# Altium PCB STM32F103C8T6_custom-board.PcbDoc
Units mil, origin at the board's own origin, x right, y up, seen from the top; angles counter-clockwise.
Board outline 900 x 2100 mil, 2 copper layers (Top Layer, Bottom Layer); 45 components, 56 nets, 197 pads, 0 vias.
Unrouted connection lines stored in the file: 136.
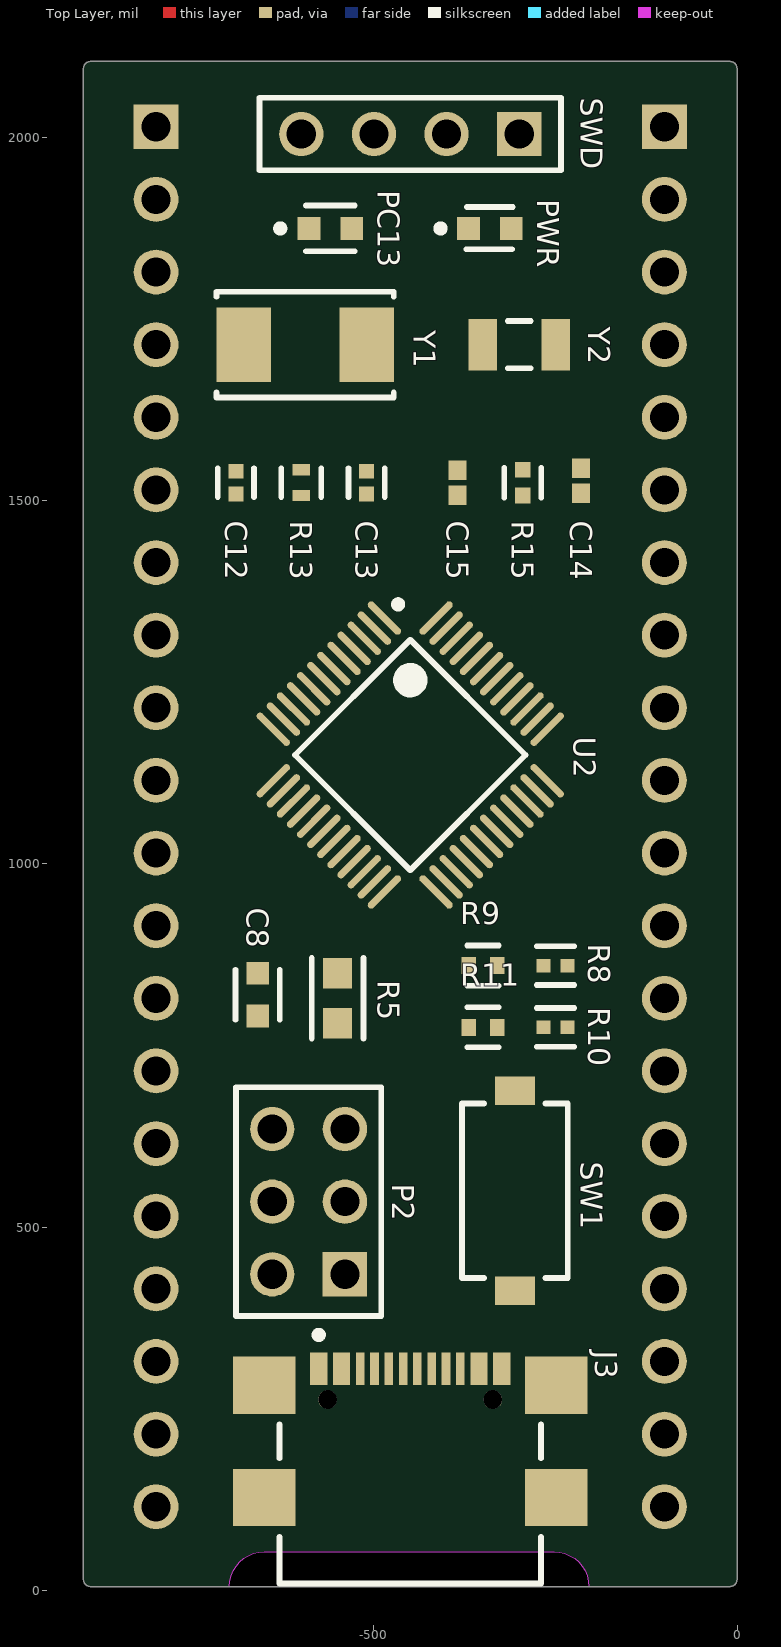
[diagram p0: Top Layer view]
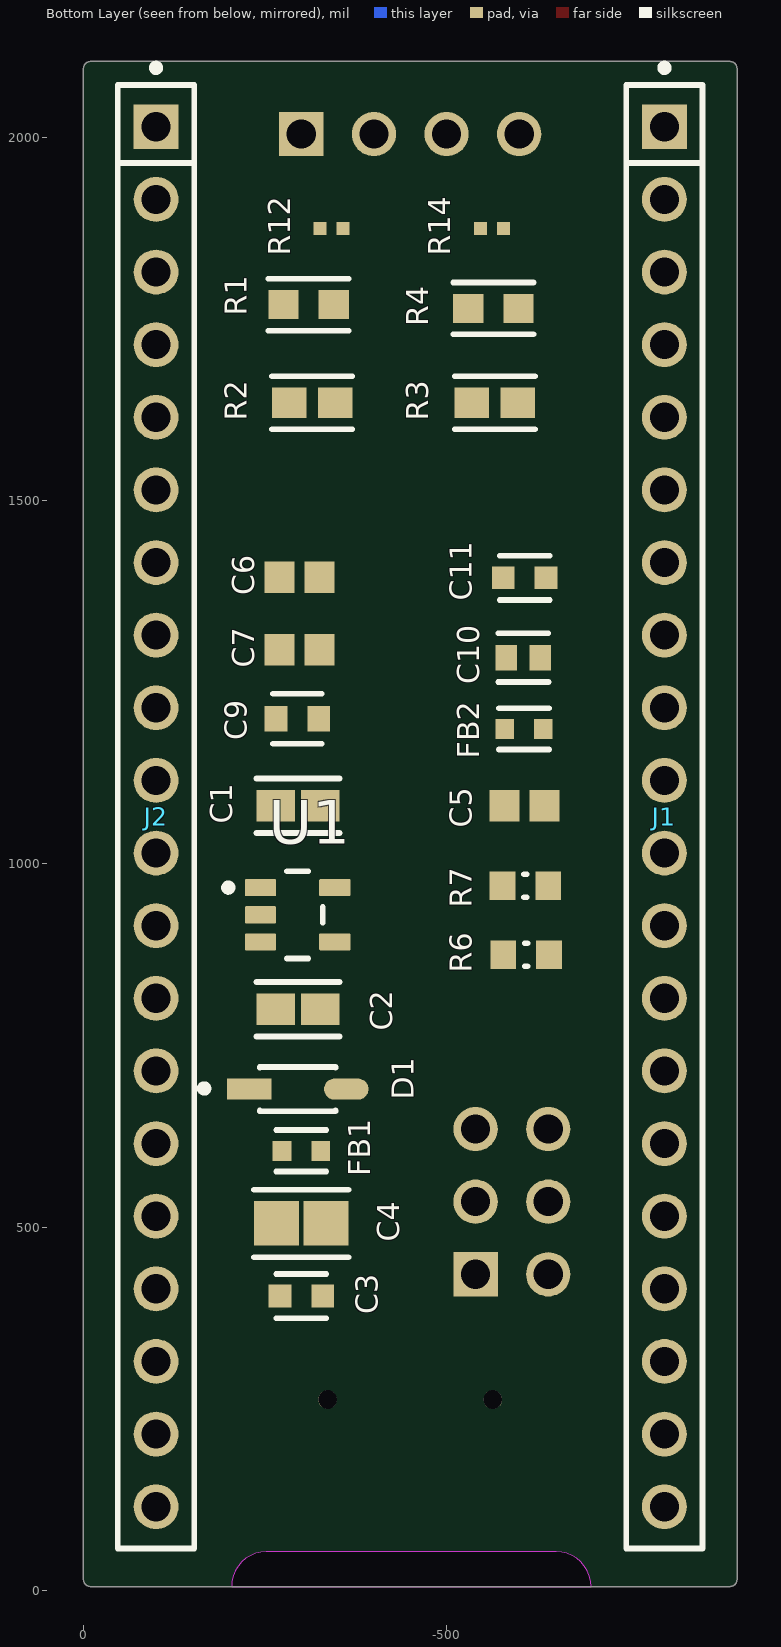
[diagram p1: Bottom Layer view, seen from below]

## Layer stack, top to bottom
Top Solder: solder mask 0.4, Solder Resist, Dk 3.5
Top Layer: signal copper 1.4
Dielectric 1: dielectric 12.6, FR-4, Dk 4.8
Bottom Layer: signal copper 1.4
Bottom Solder: solder mask 0.4, Solder Resist, Dk 3.5

## Board outline
-900,15 ccw(c-890,15) -890,5 -10,5 ccw(c-10,15) 0,15 0,2095 ccw(c-10,2095) -10,2105 -890,2105 ccw(c-890,2095) -900,2095
cut-out: -698.99,5 cw(c-650.99,5) -650.99,53 -252,53 cw(c-252,5) -204,5

## Design rules (kind name [scope] priority, off if disabled: settings)
Clearance [All] p1: gap=10 ignorepadtopadclearanceinfootprint=FALSE
PolygonConnect [All] p1: connectstyle=Relief reliefconductorwidth=10 reliefentries=4 polygonreliefangle="90 Angle" airgapwidth=10
RoutingVias [All] p1: holewidth=28 width=50 viastyle="Through Hole" minholewidth=28 minwidth=50 maxholewidth=28 maxwidth=50
SolderMaskExpansion [All] p1: expansion=4 istentingtop=FALSE
SupplyNets "Schematic Supply Nets_3" [InNet('VBUS')] p1: voltage=0.000
SupplyNets "Schematic Supply Nets_2" [InNet('+3.3V')] p2: voltage=0.000
SupplyNets "Schematic Supply Nets_1" [InNet('GND')] p3: voltage=0.000
SupplyNets "Schematic Supply Nets" [InNet('+5V')] p4: voltage=0.000
Width [All] p1: maxlimit=10 minlimit=10 preferedwidth=10
30 further rules are at their usual default settings.

## Components (designator, comment, footprint, x,y, rotation, side; value= is the part's Value field where it differs from the comment)
C1 "10uF 0603" FP-CC0603-DC-IPC_A -295.54,1080 r0 bottom
C2 "10uF 0603" FP-CC0603-DC-IPC_A -295.54,800 r180 bottom
C3 "1uF 0603" FP-VJ0603Y105KXJCW1BC-MFG -300,405 r0 bottom
C4 "47uF 0805" FP-C2012-125-0_2-IPC_A -300,505 r0 bottom
C5 "0.1uF 0603" CAPC1608X95X40ML15T15 -607.56,1080 r180 bottom
C6 "0.1uF 0603" CAPC1608X95X40ML15T15 -297.56,1395 r0 bottom
C7 "0.1uF 0603" CAPC1608X95X40ML15T15 -297.56,1295 r180 bottom
C8 "1uF 0603" FP-VJ0603Y105KXJCW1BC-MFG -660,820 r270 top
C9 "4.7uF 0603" FP-CC0603-DC-MFG -294.53,1200 r180 bottom
C10 "10nF 0603" FP-C0603C-CF-MFG -605.62,1284 r180 bottom value="10,000 pF"
C11 "1uF 0603" FP-VJ0603Y105KXJCW1BC-MFG -607.53,1394 r180 bottom
C12 "8pF 0402" FP-C0402-BB-MFG -690,1525 r270 top value="8.2 pF"
C13 "8pF 0402" FP-C0402-BB-MFG -510,1525 r90 top value="8.2 pF"
C14 "9pF 0402" CAPC1005X56X25NL10T15 -215,1527.68 r90 top
C15 "9pF 0402" CAPC1005X56X25NL10T15 -385,1525 r90 top
D1 "40V 1A" FP-SOD123-IPC_A -295,690 r180 bottom
FB1 "120Ω 0603" FP-BLM18-0_15-t0_8-MFG -300,605 r180 bottom
FB2 "120Ω 0603" FP-BLM18-0_15-t0_8-MFG -606.57,1186 r0 bottom
J1 "Header 20 pin" FP-TSW-120-05-G-S-MFG -800,1065 r270 bottom
J2 "Header 20 pin" FP-TSW-120-05-G-S-MFG -100,1065 r270 bottom
J3 "USB4110-GF-A" FP-USB4110-GF-A-MFG -450,160 r0 top
P2 "Jumper 3x2" SMTC-TSW-103-08-X-D -540,435 r90 top
PC13 "BLUE LED" FP-LTST-C191TBKT-MFG -560,1875 r0 top (schematic designator D3)
PWR "RED LED" FP-SML-LX0603IW-TR-MFG -340.47,1875 r0 top (schematic designator D2)
R1 "10kΩ 0603" FP-AC0603-IPC_A -310,1770 r180 bottom
R2 "22Ω 0603" FP-RMCF0603-IPC_A -315,1635 r0 bottom
R3 "22Ω 0603" FP-RMCF0603-IPC_A -566.54,1635 r180 bottom
R4 "10kΩ 0603" FP-AC0603-IPC_A -564.52,1765 r0 bottom
R5 "10kΩ 0603" FP-AC0603-IPC_A -550,815 r270 top
R6 "100kΩ 0603" RESC0603(1608)_N -609.5,875 r180 bottom value="100000.00 Ohm"
R7 "100kΩ 0603" RESC0603(1608)_N -608.5,970 r0 bottom value="100000.00 Ohm"
R8 "5.1kΩ 0402" FP-RN73R1E-IPC_C -250,860 r0 top
R9 "22Ω 0402" FP-RMCF0402-MFG -349.68,860 r0 top
R10 "5.1kΩ 0402" FP-RN73R1E-IPC_C -250,775 r0 top
R11 "22Ω 0402" FP-RMCF0402-MFG -349.68,775 r0 top
R12 "510Ω 0402" RESC1005X40X25LL05T05 -341.75,1875 r0 bottom
R13 "200kΩ 0402" FP-CRCW0402-Pe3-MFG -600,1525 r90 top
R14 "510Ω 0402" RESC1005X40X25LL05T05 -562.75,1875 r180 bottom
R15 "1MΩ 0402" FP-MCS0402-MFG -295,1525 r90 top
SW1 "" FP-PTS635SK25SM-MFG -306,550 r90 top
SWD "Header 4 pin" SMTC-TSW-104-08-X-S -300,2005 r180 top (schematic designator P1)
U1 "TLV75733PDBVR" FP-DBV0005A-MFG -295,930 r180 bottom
U2 "STM32F103C8T6" STM-LQFP48_L -450,1150 r315 top
Y1 "8MHz" FP-ABM7-MFG -594.65,1715 r180 top
Y2 "32.768KHz" FP-ABS07AIG-MFG -300,1715 r180 top

## Footprints (in the part's own frame and the unit in brackets; to place one, negate y for a bottom-side part, rotate by r counter-clockwise, add the part's x,y. Pads: shape width x height; smd on the part's side, far side on the other; paste and mask are expansions set on the pad)
CAPC1005X56X25NL10T15 [mm] "Chip Capacitor, 2-Leads, Body 1.00x0.50mm, IPC Medium Density"
  rect 0.68x0.64 smd: 1(-0.44,0) 2(0.44,0)
  body extent -0.55,-0.3 0.55,0.3, height 0.56
CAPC1608X95X40ML15T15 [mm] "Chip Capacitor, 2-Leads, Body 1.60x0.80mm, IPC Low Density"
  rect 1.05x1.1 smd: 1(-0.7,0) 2(0.7,0)
  body extent -0.88,-0.48 0.87,0.47, height 0.95
FP-ABM7-MFG [mm]
  rect 1.9x2.6 smd paste+0 mask+0: 1(-2.15,0) 2(2.15,0)
  silkscreen extent -3.1,-1.85 3.1,1.85, body extent -3.2,-1.95 3.2,1.95, height 0.25
FP-ABS07AIG-MFG [mm]
  rect 1x1.8 smd paste+0 mask+0: 1(-1.275,0) 2(1.275,0)
  silkscreen extent -0.4,-0.82 0.4,0.82, body extent -1.88,-1 1.87,1, height 0.25
FP-AC0603-IPC_A [mil]
  rect 41.68x39.85 smd paste+0 mask+0: 1(-34.52,0) 2(34.52,0)
  silkscreen extent -55,-36 55,36, body extent -31,-16 31,16, height 22
FP-BLM18-0_15-t0_8-MFG [mm]
  rect 0.65x0.7 smd paste+0 mask+0: 1(-0.675,0) 2(0.675,0)
  silkscreen extent -0.87,-0.73 0.87,0.73, body extent -0.8,-0.4 0.8,0.4, height 0.95
FP-C0402-BB-MFG [mm]
  rect 0.52x0.52 smd paste+0 mask+0: 1(-0.4,0) 2(0.4,0)
  silkscreen extent -0.5,-0.64 0.5,0.64, body extent -0.8,-0.4 0.8,0.4, height 0.25
FP-C0603C-CF-MFG [mm]
  rect 0.75x0.9 smd paste+0 mask+0: 1(-0.6,0) 2(0.6,0)
  silkscreen extent -0.87,-0.85 0.88,0.85, body extent -0.8,-0.4 0.8,0.4, height 0.87
FP-C2012-125-0_2-IPC_A [mil]
  rect 62.13x61.27 smd paste+0 mask+0: 1(-34.02,0) 2(34.02,0)
  silkscreen extent -65,-46 65,46, body extent -39,-25 39,25, height 57
FP-CC0603-DC-IPC_A [mil]
  rect 53.34x43.55 smd paste+0 mask+0: 1(-30.54,0) 2(30.54,0)
  silkscreen extent -57,-38 57,38, body extent -31,-16 31,16, height 39
FP-CC0603-DC-MFG [mm]
  rect 0.8x0.9 smd paste+0 mask+0: 1(-0.75,0) 2(0.75,0)
  silkscreen extent -0.85,-0.87 0.85,0.87, body extent -0.8,-0.4 0.8,0.4, height 1
FP-CRCW0402-Pe3-MFG [mm]
  rect 0.4x0.6 smd paste+0 mask+0: 1(-0.45,0) 2(0.45,0)
  silkscreen extent -0.5,-0.7 0.5,0.7, body extent -0.75,-0.4 0.75,0.4, height 0.25
FP-DBV0005A-MFG [mm]
  rrect17% 1.1x0.6 smd paste+0 mask+0: 1(-1.3,0.95) 2(-1.3,0) 3(-1.3,-0.95) 4(1.3,-0.95) 5(1.3,0.95)
  silkscreen extent -2.55,-1.53 0.87,1.52, body extent -1.4,-1.45 1.4,1.45, height 1.45
FP-LTST-C191TBKT-MFG [mm]
  rect 0.8x0.8 smd paste+0 mask+0: 1(-0.75,0) 2(0.75,0)
  silkscreen extent -1.87,-0.8 0.85,0.8, body extent -1.25,-0.55 1.25,0.55, height 0.25
FP-MCS0402-MFG [mm]
  rect 0.55x0.55 smd paste+0 mask+0: 1(-0.45,0) 2(0.45,0)
  silkscreen extent -0.53,-0.65 0.53,0.65, body extent -0.82,-0.38 0.82,0.38, height 0.25
FP-PTS635SK25SM-MFG [mm]
  rect 1x1.4 smd paste+0 mask+0: 1(-3.5,0) 2(3.5,0)
  silkscreen extent -3.05,-1.85 3.05,1.85, body extent -4.1,-1.95 4.1,1.95, height 0.25
FP-RMCF0402-MFG [mm]
  rect 0.5x0.6 smd paste+0 mask+0: 1(-0.5,0) 2(0.5,0)
  silkscreen extent -0.55,-0.7 0.55,0.7, body extent -0.85,-0.4 0.85,0.4, height 0.25
FP-RMCF0603-IPC_A [mil]
  rect 47.48x41.66 smd paste+0 mask+0: 1(-31.54,0) 2(31.54,0)
  silkscreen extent -55,-37 55,37, body extent -31,-16 31,16, height 22
FP-RN73R1E-IPC_C [mil]
  rect 19.2x18.6 smd paste+0 mask+0: 1(-16.3,0) 2(16.3,0)
  silkscreen extent -26,-27 26,27, body extent -30,-15 30,15, height 10
FP-SML-LX0603IW-TR-MFG [mm]
  rect 0.8x0.8 smd paste+0 mask+0: 1(-0.75,0) 2(0.75,0)
  silkscreen extent -1.85,-0.73 0.8,0.75, body extent -1.25,-0.63 1.25,0.63, height 0.25
FP-SOD123-IPC_A [mil]
  rect 61.32x29.23 smd paste+0 mask+0: 1(-66.94,0)
  rrect100% 61.32x29.23 smd paste+0 mask+0: 2(66.94,0)
  silkscreen extent -134,-31 52,31, body extent -72,-31 72,31, height 57
FP-TSW-120-05-G-S-MFG [mm]
  rect 1.57x1.57 hole 1.02 paste-2539.97 mask+0: 1(-24.13,0)
  round 1.57 hole 1.02 paste-2539.97 mask+0: 2(-21.59,0) 3(-19.05,0) 4(-16.51,0) 5(-13.97,0) 6(-11.43,0) 7(-8.89,0) 8(-6.35,0) 9(-3.81,0) 10(-1.27,0) 11(1.27,0) 12(3.81,0) 13(6.35,0) 14(8.89,0) 15(11.43,0) 16(13.97,0) 17(16.51,0) 18(19.05,0) 19(21.59,0) 20(24.13,0)
  silkscreen extent -26.31,-1.34 25.59,1.34, body extent -25.53,-1.27 25.4,1.27, height 5.54
FP-USB4110-GF-A-MFG [mm]
  rect 2.18x2 smd paste+0 mask+0: 1(-5.11,3.105) 2(5.11,3.105) 3(-5.11,-0.825) 4(5.11,-0.825)
  rect 0.6x1.15 smd paste+0 mask+0: A1-B12(-3.2,3.68) A4-B9(-2.4,3.68) B1-A12(3.2,3.68) B4-A9(2.4,3.68)
  rect 0.3x1.15 smd paste+0 mask+0: A5(-1.25,3.68) A6(-0.25,3.68) A7(0.25,3.68) A8(1.25,3.68) B5(1.75,3.68) B6(0.75,3.68) B7(-0.75,3.68) B8(-1.75,3.68)
  round 0.65 hole 0.65 unplated paste-2539.97 mask+0: ""(-2.89,2.605) ""(2.89,2.605)
  silkscreen extent -4.57,-3.83 4.57,4.99, body extent -6.3,-3.92 6.3,4.36, height 0.25
FP-VJ0603Y105KXJCW1BC-MFG [mm]
  rect 0.8x0.8 smd paste+0 mask+0: 1(-0.75,0) 2(0.75,0)
  silkscreen extent -0.87,-0.77 0.87,0.77, body extent -0.8,-0.4 0.8,0.4, height 0.95
RESC0603(1608)_N [mm] "Chip Resistor, Body 1.6x0.8mm, IPC Medium Density"
  rect 0.9x1 smd: 1(-0.8,0) 2(0.8,0)
  silkscreen extent -0.05,-0.4 0.05,0.4, body extent -0.85,-0.47 0.85,0.47, height 0.6
RESC1005X40X25LL05T05 [mm] "Chip Resistor, 2-Leads, Body 1.00x0.50mm, IPC High Density"
  rect 0.45x0.45 smd: 1(-0.4,0) 2(0.4,0)
  body extent -0.53,-0.27 0.53,0.28, height 0.4
SMTC-TSW-103-08-X-D [mm] ".025 SQ Post Terminal Strip Assembly, 2x3 Pins, Vertical, 2.54mm Pitch, Male"
  rect 1.55x1.55 hole 1.02: 1(0,0)
  round 1.55 hole 1.02: 2(0,2.54) 3(2.54,0) 4(2.54,2.54) 5(5.08,0) 6(5.08,2.54)
  silkscreen extent -1.46,-1.27 6.54,3.81, body extent -1.27,-1.27 6.35,3.81, height 8.38
SMTC-TSW-104-08-X-S [mm] ".025 SQ Post Terminal Strip Assembly, 1x4 Pins, Vertical, 2.54mm Pitch, Male"
  rect 1.55x1.55 hole 1.02: 1(0,0)
  round 1.55 hole 1.02: 2(2.54,0) 3(5.08,0) 4(7.62,0)
  silkscreen extent -1.46,-1.27 9.08,1.27, body extent -1.27,-1.27 8.89,1.27, height 8.38
STM-LQFP48_L [mm] "QFP, 48-Leads, Body 7x7mm, Pitch 0.5mm, IPC High Density"
  oval 1.55x0.25 smd: 1(-4.025,2.75) 2(-4.025,2.25) 3(-4.025,1.75) 4(-4.025,1.25) 5(-4.025,0.75) 6(-4.025,0.25) 7(-4.025,-0.25) 8(-4.025,-0.75) 9(-4.025,-1.25) 10(-4.025,-1.75) 11(-4.025,-2.25) 12(-4.025,-2.75) 25(4.025,-2.75) 26(4.025,-2.25) 27(4.025,-1.75) 28(4.025,-1.25) 29(4.025,-0.75) 30(4.025,-0.25) 31(4.025,0.25) 32(4.025,0.75) 33(4.025,1.25) 34(4.025,1.75) 35(4.025,2.25) 36(4.025,2.75)
  oval 0.25x1.55 smd: 13(-2.75,-4.025) 14(-2.25,-4.025) 15(-1.75,-4.025) 16(-1.25,-4.025) 17(-0.75,-4.025) 18(-0.25,-4.025) 19(0.25,-4.025) 20(0.75,-4.025) 21(1.25,-4.025) 22(1.75,-4.025) 23(2.25,-4.025) 24(2.75,-4.025) 37(2.75,4.025) 38(2.25,4.025) 39(1.75,4.025) 40(1.25,4.025) 41(0.75,4.025) 42(0.25,4.025) 43(-0.25,4.025) 44(-0.75,4.025) 45(-1.25,4.025) 46(-1.75,4.025) 47(-2.25,4.025) 48(-2.75,4.025)
  silkscreen extent -4.15,-2.85 2.85,3.55, body extent -3.5,-3.5 3.5,3.5, height 1.6

## Part data
C1 C2: library part CMP-03422-001507-1, "CAP CER 10UF 10V X5R 0603", Capacitance=10uF, Case Code (Imperial)=0603, Case Code (Metric)=1608, Dielectric=X5R, Max Operating Temperature=85°C, Min Operating Temperature=-55°C, Package Quantity=4000, Resistor Type=Ceramic, Tolerance=10%, Voltage Rating=10V, Case/Package=0603, Depth=0.8mm, Halogen Free="Halogen Free", Lead Free="Lead Free", Length=0.063inch, Mount="Surface Mount", Packaging="Tape and Reel", RoHS Compliant=Yes, Termination=SMD/SMT, Thickness=0.035inch, Voltage Rating (DC)=10V, Weight=7.1E-05oz, Width=0.031inch
C3 C8 C11: library part CMP-00030-45106517-1, "VJ0603Y105KXJCW1BC Multilayer Ceramic Capacitor, 1 uF, 16 V, ± 10%, X7R, 0603 [1608 Metric]", Capacitance=1µF, Case/Package=0603, Dielectric=X7R, Dielectric Material=Tantalum, Max Operating Temperature=125°C, Min Operating Temperature=-55°C, Tolerance=10%, Voltage Rating=16V, Depth=800µm, Height=950µm, Lead Free="Lead Free", Length=1.6mm, Material=Ceramic, Mount="Surface Mount", NexarPartId=45106517, Packaging="Tape and Reel", Radiation Hardening=No, RoHS=Compliant, Voltage Rating (DC)=16V
C4: library part CMP-08246-006522-1, "Multilayer Ceramic Capacitors 47μF ±20% 10V JB SMD 0805", Capacitance=47uF, Case Code (Imperial)=0805, Case Code (Metric)=2012, Dielectric Material=Ceramic, Max Operating Temperature=85°C, Min Operating Temperature=-25°C, Package Quantity=2000, Tolerance=20%, Voltage Rating=10V, Case/Package=0805, Height=1.25mm, Lead Free="Lead Free", Length=0.079inch, Mount="Surface Mount", Packaging="Tape and Reel", Resistor Type=Ceramic, RoHS Compliant=Yes, Series=C, Termination=SMD/SMT, Thickness=0.057inch, Voltage Rating (DC)=10V, Width=0.049inch
C5 C6 C7: library part CMP-2006-01550-1, Manufacturer=Vitramon, Part Number=VJ0603Y104KXQCW1BC
C9: library part CMP-03422-001038-2, "CAP CER 4.7UF 6.3V X7R 0603", Capacitance=4.7uF, Case Code (Imperial)=0603, Case Code (Metric)=1608, Max Operating Temperature=125°C, Min Operating Temperature=-55°C, Tolerance=20%, Voltage Rating=6.3V, Case/Package=0603, Mount="Surface Mount", Packaging="Cut Tape", RoHS Compliant=Yes
C10: library part CMP-03020-022676-1, "C0603 10,000 pF X7R 30ppm/°C 5.00% 16 V", Capacitance="10,000 pF", Manufacturer=KEMET, Manufacturer Part Number=C0603C103J4RACAUTO, Package=C0603C-CF, Temperature="-55°C to +125°C", Temperature Characteristic=X7R, Temperature Coefficient=30ppm/°C, Temperature Range High=+125°C, Temperature Range Low=-55°C, Tolerance=0.05, Voltage Rating="16 V", Automotive=Yes, Automotive Grade="Grade 1", Category=Cap, ComponentLink2Description=Datasheet, ComponentLink2URL=https://api.kemet.com/component-edge/download/datasheet/C0603C100J5GACAUTO.pdf, Device Class L1="Passive Components", Device Class L2=Capacitors, Device Class L3="Ceramic Capacitors", Height=0.87mm, Lead Free=Yes, Material=Ceramic, Octopart=https://octopart.com/c0603c103j4racauto-kemet-91893811, RoHS=TRUE
C12 C13: library part CMP-03020-024178-1, "C0402 8.2 pF C0G 0.5 pF 50 V", Capacitance="8.2 pF", Manufacturer=Kemet, Manufacturer Part Number=C0402C829D5GACAUTO, Package=C0402-BB, Temperature="-55°C to +125°C", Temperature Characteristic=C0G, Temperature Coefficient=15%, Temperature Range High=+125°C, Temperature Range Low=-55°C, Tolerance="0.5 pF", Voltage Rating="50 V", Automotive=No, Category=Cap, ComponentLink2Description=Datasheet, ComponentLink2URL=https://content.kemet.com/datasheets/KEM_C1002_X7R_SMD.pdf, Device Class L1="Passive Components", Device Class L2=Capacitors, Device Class L3="Ceramic Capacitors", Height=0.55mm, Ipc Land Pattern Name=CAPC10050X50, Lead Free=Yes, Material=Ceramic, Octopart=https://octopart.com/c0402c829d5gacauto-kemet-89441553, RoHS=TRUE
C14 C15: library part CMP-2008-02458-1, Manufacturer="AVX Interconnect / Elco", Part Number=04023A100DAT2A
D1: library part CMP-0303-00003-3, "DIODE SCHOTTKY 40V 1A SOD123", Average Rectified Current=1A, Capacitance=110pF, Case/Package=SOD-123-2, Forward Voltage=450mV, Max Forward Surge Current (Ifsm)=25A, Max Operating Temperature=125°C, Max Power Dissipation=450mW, Max Repetitive Reverse Voltage (Vrrm)=40V, Min Operating Temperature=-65°C, Package Quantity=3000, Peak Reverse Current=50uA, Contact Plating=Tin, Current Rating=1A, Element Configuration=Single, Forward Current=1A, Height=1.25mm, Lead Free="Lead Free", Length=2.85mm, Max Reverse Voltage (DC)=40V, Number of Pins=2, Output Current=1A, Packaging="Tape and Reel", Peak Non-Repetitive Surge Current=25A, Polarity=Standard, Radiation Hardening=No, REACH SVHC="No SVHC", Termination=SMD/SMT, Voltage Rating (DC)=40V, Weight=0.000353oz, Width=1.7mm
FB1 FB2: library part CMP-06046-002776-1, "Chip Ferrite Bead, 0603, 120Ω @ 100MHz, 0.05Ω, 25%, 2A", RoHS Compliant=Yes
J1 J2: library part CMP-00575-00271415-1, "TSW-120-05-G-S Headers & Wire Housings Classic PCB Header Strips, 0.100 pitch", Color=Black, Manufacturer Lifecycle Status=PRODUCTION, Connector Type="Male Pin", Contact Material=Bronze, Contact Mating Length=2.667mm, Contact Plating=Gold, Gender=Male, Height=2.54mm, Housing Color=Black, Housing Material=Plastic, Lead Free="Lead Free", Lead Pitch=2.54mm, Length=50.8mm, Lifecycle Status=Production, Mount="Through Hole", NexarPartId=271415, Number of Contacts=20, Number of Positions=20, Number of Rows=1, Pitch=2.54mm, REACH SVHC="No SVHC", RoHS=Compliant, Termination=Solder, Width=2.54mm
J3: library part CMP-245163-000002-1, "CONN USB 2.0 TYPE-C R/A SMT", Current Rating=3/4.25/1.25/0.25A, Manufacturer=GCT, Package=0, Temperature="-40°C to +85°C", Temperature Range High=+85°C, Temperature Range Low=-40°C, Voltage Rating=20V, Automotive=No, Category=Conn, ComponentLink2Description=Datasheet, ComponentLink2URL=https://gct.co/files/drawings/usb4110.pdf, Conn Orientation="Right Angle", Contact Material=Gold,Nickel, Device Class L1=Connectors, Device Class L2="USB Connectors", Device Class L3=unset, Digikey Description="CONN USB 2.0 TYPE-C R/A SMT", Height=3.46mm, Is Female=yes, Lead Free=Yes, Manufacturer Part Number=USB4110-GF-A, Number of Contacts=16, Octopart=https://octopart.com/usb4110-gf-a-gct-103941985, RoHS=TRUE, Shielding=true, Standoff Height=0.1mm, Usb Standard="USB 2.0"
P2: library part CMP-1024-00337-1, "0.025\" SQ Post Header, Through-hole, Vertical, -55 to 125 degC, 2.54 mm Pitch, 6-Pin, Male, RoHS", Manufacturer=Samtec, PartNumber=TSW-103-08-F-D, Temperature Range="-55 to 125 degC", ComponentLink1Description="Manufacturer URL", ComponentLink1URL=http://www.samtec.com, ComponentLink2Description=Datasheet, ComponentLink2URL=http://www.samtec.com/documents/webfiles/pdf/TSW_TH.PDF, ComponentLink3Description="Package Specification", ComponentLink3URL=http://www.samtec.com/documents/webfiles/cpdf/TSW-XXX-XX-XXX-X-XX-XXX-MKT.pdf, DatasheetVersion=F-214, Mounting Technology=Through-hole, Orientation=Vertical, PackageDescription=".025[0.64] SQ. Post Terminal Strip Assembly", PackageReference=TSW-103-08-X-D, PackageVersion="DM, 8/1988", Pitch="2.54 mm", RoHS=True
PC13: library part CMP-22017-000008-1, "LED BLUE CLEAR CHIP SMD", Case Code (Imperial)=0603, Case Code (Metric)=1608, Color=Blue, Forward Current=20mA, Forward Voltage=3.8V, Lens Color=Colorless, Max Operating Temperature=80°C, Max Power Dissipation=75mW, Min Operating Temperature=-20°C, Package Quantity=1, Power Dissipation=76mW, Reverse Voltage=5V, Case/Package=0603, Depth=1.6mm, Dominant Wavelength=475nm, Height=0.55mm, Illumination Color=Blue, Lead Free="Lead Free", Length=0.8mm, Lens Style=Diffused, Lens Transparency=Clear, Luminous Intensity=180mcd, Mount="Surface Mount", Number of Elements=1, Number of LEDs=1, Number of Pins=2, Packaging="Tape and Reel", Radiation Hardening=No, Test Current=20mA, Viewing Angle=130°, Wavelength=468nm, Width=0.8mm
PWR: library part CMP-57192-000012-1, "LED RED DIFFUSED SMD", Case Code (Imperial)=0603, Case Code (Metric)=1608, Color=Red, Forward Current=20mA, Forward Voltage=2V, Lens Color=White, Max Operating Temperature=85°C, Min Operating Temperature=-25°C, Package Quantity=1, Power Dissipation=50mW, Approvals=UL, Case/Package=0603, Diameter=0.061inch, Dominant Wavelength=635nm, Height=0.6mm, Illumination Color=Red, Lead Free="Lead Free", Length=1.6mm, Lens Style=Diffused, Lens Transparency=Diffused, Luminous Intensity=14mcd, Mount="Surface Mount", Number of LEDs=1, Number of Pins=2, Packaging="Tape and Reel", RoHS Compliant=Yes, Test Current=20mA, Viewing Angle=160°, Wavelength=635nm, Width=0.8mm
R1 R4 R5: library part CMP-03412-040683-1, "RES 10kΩ 5.00% 0.2W 0603"
R2 R3: library part CMP-26527-002321-1, "22Ω ±5% 0.1W 0603 Thick Film Chip Resistor AEC-Q200 compliant", Case/Package=0603, Max Operating Temperature=155°C, Max Power Dissipation=100mW, Min Operating Temperature=-55°C, Resistance=22R, Resistor Type="Thick Film", Temperature Coefficient=200ppm/°C, Tolerance=5%, Contact Plating=Tin, Features="Automotive AEC-Q200", Height=0.022inch, Length=0.061inch, Mount="Surface Mount", Number of Terminations=2, Packaging="Tape and Reel", Radiation Hardening=No, RoHS Compliant=Yes, Series=RMCF, Width=0.031inch
R6 R7: library part CMP-1012-00736-1, "100K 0.1W 1% 0603 (1608 Metric)  SMD", Case-EIA=0603, Case-Metric=1608, Power="0.1 W", Tolerance="1 %", Technology=SMT
R8 R10: library part CMP-04015-008529-1, "5.1kΩ ±1% 0.063W, 1/16W Chip Resistor 0402 (1005 Metric) Moisture Resistant Thin Film"
R9 R11: library part CMP-26527-006952-1, "22Ω ±1% 0.063W 0402 Thick Film Chip Resistor AEC-Q200 compliant", Case/Package=0402, Max Operating Temperature=155°C, Max Power Dissipation=63mW, Min Operating Temperature=-55°C, Resistance=22R, Resistor Type="Thick Film", Temperature Coefficient=100ppm/°C, Tolerance=1%, Contact Plating=Tin, Features="Automotive AEC-Q200", Height=0.016inch, Length=0.039inch, Mount="Surface Mount", Number of Terminations=2, Packaging="Tape and Reel", RoHS Compliant=Yes, Series=RMCF, Width=0.02inch
R12 R14: library part CMP-1011-00067-2, Manufacturer="Vishay Dale", Part Number=CRCW0402510RJNTD
R13: library part CMP-03613-000144-1, "RES Thick Film, 200kΩ, 1%, 0.063W, 50ppm/°C, 0402", Case/Package=0402, Max Operating Temperature=155°C, Max Power Dissipation=63mW, Min Operating Temperature=-55°C, Package Quantity=10000, Resistance=200kR, Resistor Type="Thick Film", Temperature Coefficient=50ppm/°C, Tolerance=1%, Features="Automotive AEC-Q200", Height=0.016inch, Length=0.039inch, Number of Terminations=2, Packaging="Tape and Reel", RoHS Compliant=Yes, Series=CRCW-P, Width=0.02inch
R15: library part CMP-2002-02478-2, "RES SMD 1.2K OHM 1% 1/10W 0402", Case/Package=0402, Max Operating Temperature=125°C, Min Operating Temperature=-55°C, Power Rating=62.5mW, Resistance=200R, Temperature Coefficient=25ppm/°C, Tolerance=0.1%, Voltage Rating (DC)=50V, Composition="Thin Film", Depth=0.5mm, Lead Free="Lead Free", Length=1mm, Military Standard=Not, Packaging="Tape and Reel", Width=500um
SW1: library part CMP-10040-000010-1, "SWITCH TACTILE SPST-NO 0.05A 12V", Contact Current Rating=50mA, Contact Resistance=100mΩ, Manufacturer="C&K Components", Manufacturer Part Number=PTS635SK25SM, Operating Force=260gf, Temperature="-10°C to +60°C", Temperature Range High=+60°C, Temperature Range Low=-10°C, Voltage Rating Dc=12V, Automotive=No, Category=Switch, ComponentLink2Description=Datasheet, ComponentLink2URL=https://media.digikey.com/pdf/Data%20Sheets/C&K/PTS635%20with%2025%20code%20actuator.pdf, Device Class L1=Electromechanical, Device Class L2=Switches, Device Class L3="Tactile Switches", Digikey Description="SWITCH TACTILE SPST-NO 0.05A 12V", Electromechanical Life=20000Cycles, Height=2.5mm, Lead Free=Yes, Mount="Surface Mount", Octopart=https://octopart.com/pts635sk25sm-c%26k+components-8206497, Package=PTS635SK25SM, RoHS=TRUE, Throw Configuration=SPST
SWD: library part CMP-1024-00357-1, "0.025\" SQ Post Header, Through-hole, Vertical, -55 to 125 degC, 2.54 mm Pitch, 4-Pin, Male, RoHS", Manufacturer=Samtec, PartNumber=TSW-104-08-G-S, Temperature Range="-55 to 125 degC", ComponentLink1Description="Manufacturer URL", ComponentLink1URL=http://www.samtec.com, ComponentLink2Description=Datasheet, ComponentLink2URL=http://www.samtec.com/documents/webfiles/pdf/TSW_TH.PDF, ComponentLink3Description="Package Specification", ComponentLink3URL=http://www.samtec.com/documents/webfiles/cpdf/TSW-XXX-XX-XXX-X-XX-XXX-MKT.pdf, DatasheetVersion=F-214, Mounting Technology=Through-hole, Orientation=Vertical, PackageDescription=".025[0.64] SQ. Post Terminal Strip Assembly", PackageReference=TSW-104-08-X-S, PackageVersion="DM, 8/1988", Pitch="2.54 mm", RoHS=True
U1: library part CMP-04917-000028-1, "IC REG LINEAR 3.3V 1A SOT23-5", Dropout Voltage=1350mV, Manufacturer="Texas Instruments", Max Junction Temp=+125°C, Max Supply Voltage=5.5V, Min Supply Voltage=1.45V, Output Current=1A, Output Voltage=3.3V, Package=DBV0005A, Temperature="-40°C to +125°C", Temperature Range Low=-40°C, Accuracy Percentage=1%, Automotive=No, Category=IC, ComponentLink2Description=Datasheet, ComponentLink2URL=http://www.ti.com/lit/ds/symlink/tlv757p.pdf, Device Class L1="Integrated Circuits (ICs)", Device Class L2="Power Management ICs", Device Class L3="Voltage Regulators - Linear", Digikey Description="IC REG LINEAR 3.3V 1A SOT23-5", Height=1.45mm, Ipc Land Pattern Name=SOT95P280X145-5, Lead Free=Yes, Manufacturer Part Number=TLV75733PDBVR, Mouser Description="1-A low-IQ small-size low-dropout (LDO) regulator 5-SOT-23 -40 to 125", Number Of Outputs=1, Octopart=https://octopart.com/tlv75733pdbvr-texas+instruments-91437073, Output Type=Fixed, RoHS=TRUE, Standoff Height=0mm, Temperature Range High=+125°C
U2: library part CMP-0237-00215-3, "ARM Cortex-M3 32-bit MCU, 64 KB Flash, 20 KB Internal RAM, 37 I/Os, 48-pin LQFP, -40 to 85 degC, Tray", I/Os (High Current)=37, Operating Frequency(F) (Processor speed) (MHz)=72, Supply Voltage(Vcc) min (V)=2, A/D Converter="2x12-bit (10 Channel)", ComponentLink1Description="Manufacturer URL", ComponentLink1URL=http://www.st.com/web/en/home.html, ComponentLink2Description=Datasheet, ComponentLink2URL=http://www.st.com/st-web-ui/static/active/en/resource/technical/document/datasheet/CD00161566.pdf, ComponentLink3Description="Package Specification", ComponentLink3URL=http://www.st.com/st-web-ui/static/active/en/resource/technical/document/datasheet/DM00058181.pdf, Core="ARM Cortex-M3", DatasheetVersion="Rev. 16", FLASH Size (Prog) (kB)=64, Internal RAM Size (kB)=20, Mounting Technology="Surface Mount", PackageDescription="48-Pin Low Profile Quad Flat Package, 7 x 7 mm Body, 0.5 mm Pitch", PackageReference=LQFP48, PackageVersion="Rev. 6, 06/2013", Packing=Tray, PartNumber=STM32F103C8T6
Y1: library part CMP-27762-013691-1, "Crystal 8MHz ±20ppm 8pF SMD-2 6mm x 3.5mm", Case/Package=SMD/SMT, ESR (Equivalent Series Resistance)=80R, Frequency Stability=30ppm, Frequency Tolerance=20ppm, Load Capacitance=8pF, Max Operating Temperature=85°C, Min Operating Temperature=-40°C, Frequency=8MHz, Mount="Surface Mount", Packaging="Tape and Reel"
Y2: library part CMP-27762-015869-1, "Crystal 32.768kHz ±20ppm (Tol) 9pF FUND 70kΩ Automotive 2-Pin Mini-CSMD T/R", Case/Package=SMD/SMT, ESR (Equivalent Series Resistance)=70kR, Frequency=32.768kHz, Frequency Tolerance=20ppm, Load Capacitance=9pF, Max Operating Temperature=85°C, Min Operating Temperature=-40°C, Ratings=AEC-Q200, Height=0.035inch, Length=0.126inch, Mount="Surface Mount", Packaging="Cut Tape", RoHS Compliant=Yes, Series=ABS07AIG, Width=0.059inch

## Nets (pads, with @x,y where several pads share a name; then routed paths per layer and width w, separated by ;. In a path a pad name is that pad's centre, name@x,y a point inside that pad or via, vN(x,y) a via of type N, cw(c..) or ccw(c..) an arc to the next point about the centre after c; other vN are vias at no path point)
+3.3V: C1.1 C5.2 C6.2 C7.2 C9.1 FB2.1 J1.18 J2.1 P2.1 P2.2 PC13.2 PWR.2 R1.1 R5.2 SWD.1 U1.5 U2.24 U2.36 U2.48
+5V: C2.1 C4.1 FB1.2 J2.3 U1.1 U1.3
BOOT0: R7.2 U2.44
CC1: J3.A5 R8.2
CC2: J3.B5 R10.2
GND: C1.2 C2.2 C3.2 C4.2 C5.1 C6.1 C7.1 C8.2 C9.2 C10.2 C11.2 C12.2 C13.1 C14.1 C15.1 J1.19 J1.20 J2.2 J3.1 J3.2 J3.3 J3.4 J3.A1-B12 J3.B1-A12 P2.5 P2.6 R4.1 R8.1 R10.1 R12.2 SW1.1 SWD.4 U1.2 U2.8 U2.23 U2.35 U2.47
NetD1_1: D1.1 FB1.1
NetD2_1: PWR.1 R12.1
NetD3_1: PC13.1 R14.1
NetP1_2: R1.2 R2.1 SWD.2
NetP1_3: R3.1 R4.2 SWD.3
NetP2_3: P2.3 R6.2
NetP2_4: P2.4 R7.1
NRST: C8.1 J1.17 R5.1 SW1.2 U2.7
PA0: J1.5 U2.10
PA1: J1.6 U2.11
PA2: J1.7 U2.12
PA3: J1.8 U2.13
PA4: J1.9 U2.14
PA5: J1.10 U2.15
PA6: J1.11 U2.16
PA7: J1.12 U2.17
PA8: J2.16 U2.29
PA9: J2.15 U2.30
PA10: J2.14 U2.31
PA11: J2.13 R11.2 U2.32
PA12: J2.12 R9.2 U2.33
PA15: J2.11 U2.38
PB0: J1.13 U2.18
PB1: J1.14 U2.19
PB2: R6.1 U2.20
PB3: J2.10 U2.39
PB4: J2.9 U2.40
PB5: J2.8 U2.41
PB6: J2.7 U2.42
PB7: J2.6 U2.43
PB8: J2.5 U2.45
PB9: J2.4 U2.46
PB10: J1.15 U2.21
PB11: J1.16 U2.22
PB12: J2.20 U2.25
PB13: J2.19 U2.26
PB14: J2.18 U2.27
PB15: J2.17 U2.28
PC13: J1.2 R14.2 U2.2
PC14: C14.2 J1.3 R15.1 U2.3 Y2.1
PC15: C15.2 J1.4 R15.2 U2.4 Y2.2
PD0: C12.1 R13.1 U2.5 Y1.2
PD1: C13.2 R13.2 U2.6 Y1.1
SWCLK: R3.2 U2.37
SWDIO: R2.2 U2.34
USB_DN: J3.A7 J3.B7 R11.1
USB_DP: J3.A6 J3.B6 R9.1
VBAT: J1.1 U2.1
VBUS: C3.1 D1.2 J3.A4-B9 J3.B4-A9
VDDA: C10.1 C11.1 FB2.2 U2.9
pads on no net: J3. J3.A8 J3.B8 U1.4

## Silkscreen, mask and mechanical layers (free items; w line width, h text height)
Mechanical 1:
  lines w10: -699,4 cw(c-650,4) -650,53 -252,53 cw(c-252,5) -204,5 ; -900,15 ccw(c-890,15) -890,5 -10,5 ccw(c-10,15) 0,15 0,2095 ccw(c-10,2095) -10,2105 -890,2105 ccw(c-890,2095) -900,2095 -900,15

## Dimensions
-900,-20 to -450,-15 on Top Layer